# Altium PCB ZMBo.PcbDoc (part 2 of 3)
Units mil, origin at the board's own origin, x right, y up, seen from the top; angles counter-clockwise.
Board outline 6000 x 4000 mil, 4 copper layers (Top Layer, Groun Plane, Power Plane, Bottom Layer); 254 components, 259 nets, 1004 pads, 1790 vias.
Unrouted connection lines stored in the file: 212.
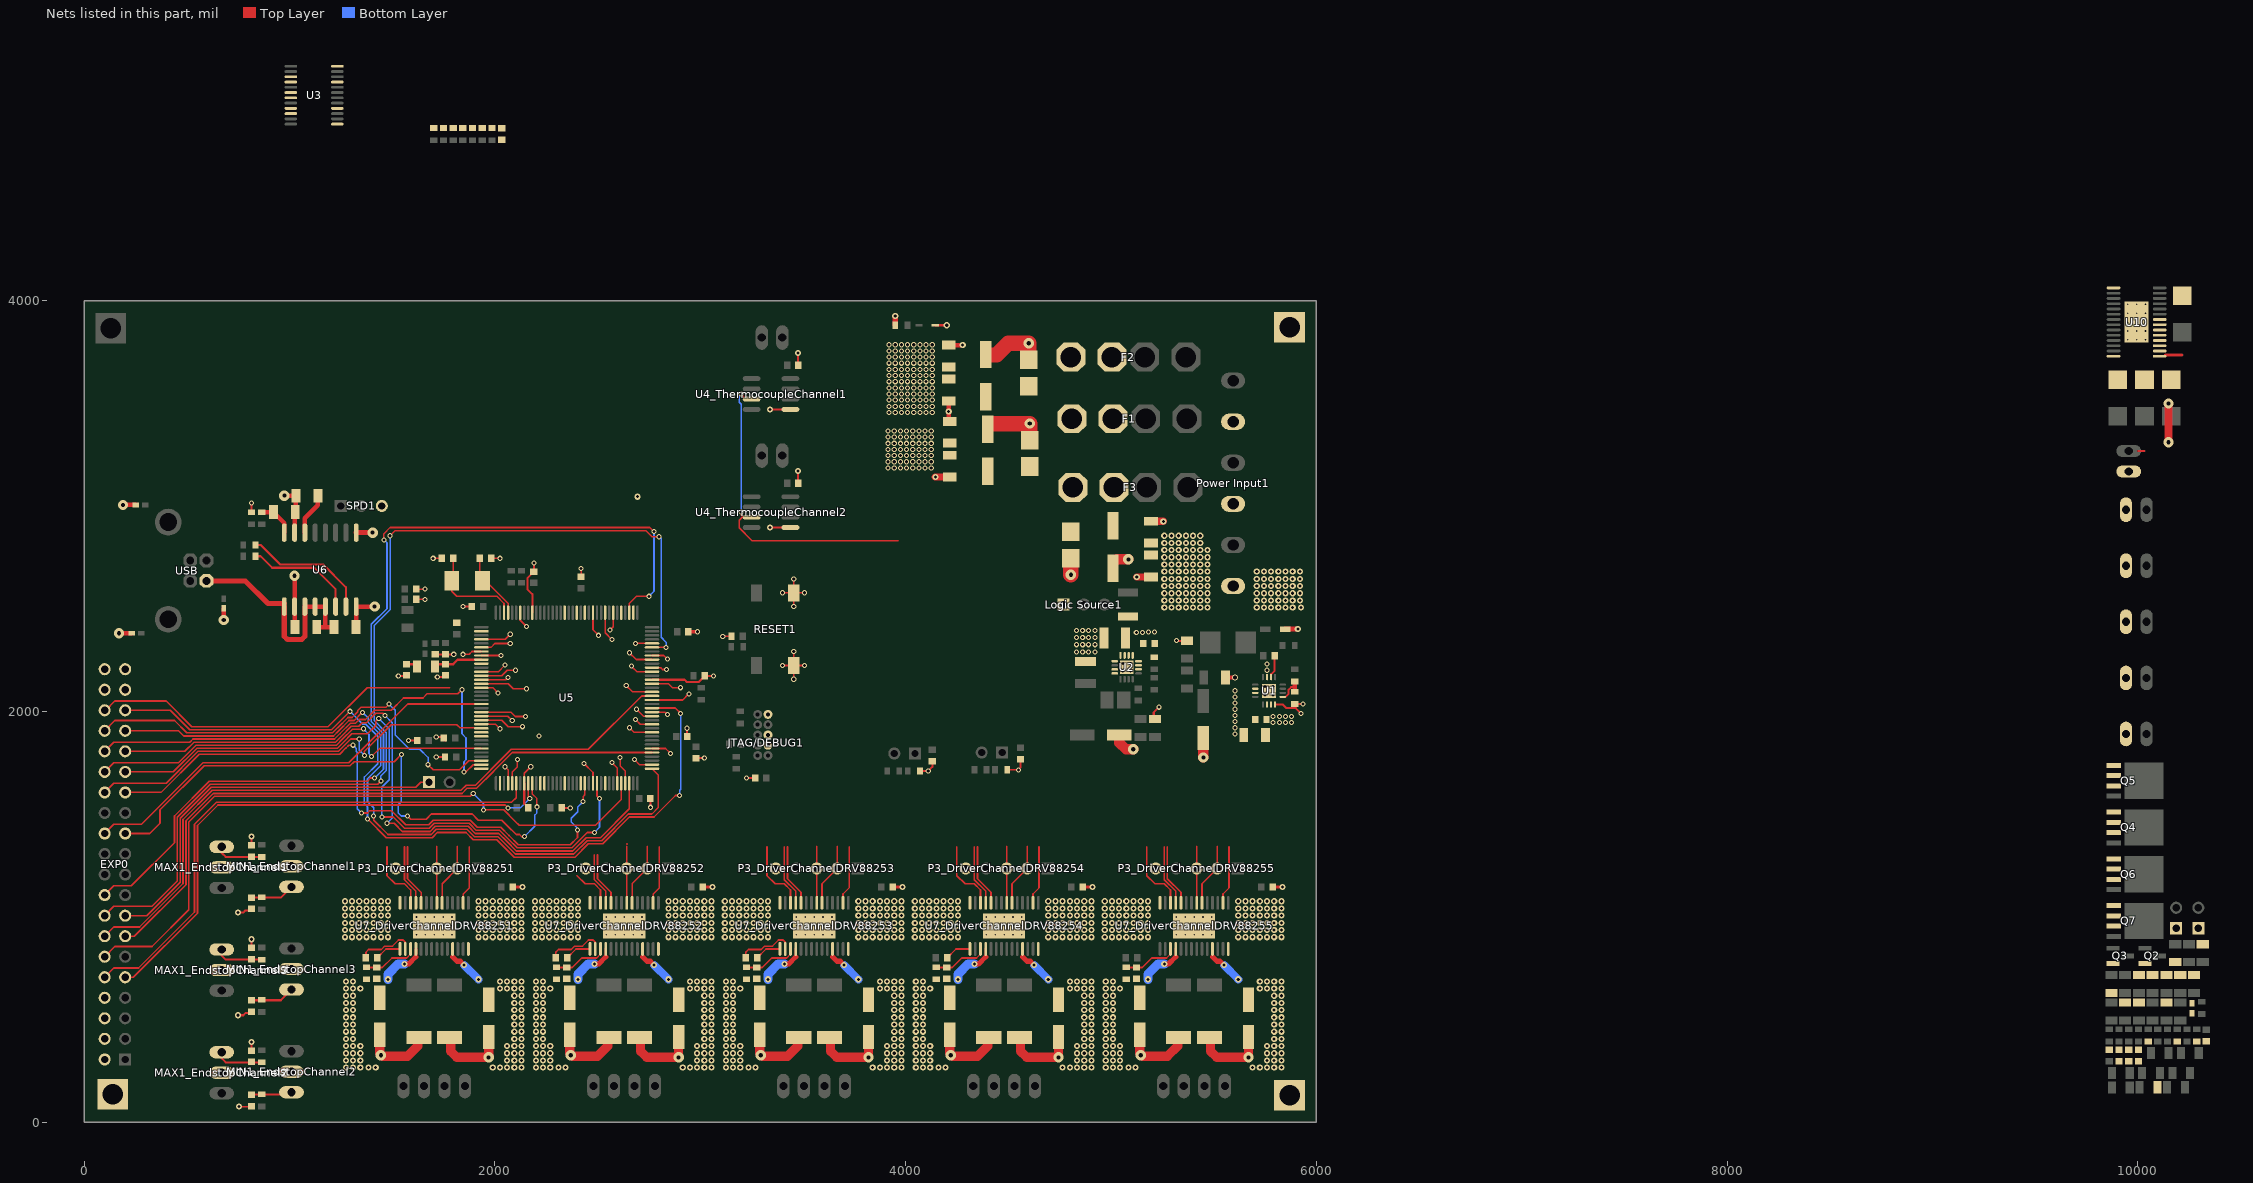
[diagram p4: the nets of this part, all layers, seen from the top]

## Via types
v1: diameter 30, hole 15, Top Layer to Bottom Layer, 1265 vias
v2: diameter 25, hole 15, Top Layer to Bottom Layer, 405 vias
v3: diameter 19.68, hole 7.87, Top Layer to Bottom Layer, 90 vias
v4: diameter 50, hole 20, Top Layer to Bottom Layer, 28 vias
v5: diameter 30, hole 20, Top Layer to Bottom Layer, 2 vias

## Nets (pads, with @x,y where several pads share a name; then routed paths per layer and width w, separated by ;. In a path a pad name is that pad's centre, name@x,y a point inside that pad or via, vN(x,y) a via of type N, cw(c..) or ccw(c..) an arc to the next point about the centre after c; other vN are vias at no path point) (continued)
+12VCC1: C10.2 C11.2 C16.1 C18.2 C19.2 C66_DriverChannelDRV88251.1 C66_DriverChannelDRV88252.1 C66_DriverChannelDRV88253.1 C66_DriverChannelDRV88254.1 C66_DriverChannelDRV88255.1 C69_DriverChannelDRV88251.1 C69_DriverChannelDRV88252.1 C69_DriverChannelDRV88253.1 C69_DriverChannelDRV88254.1 C69_DriverChannelDRV88255.1 C70_DriverChannelDRV88251.1 C70_DriverChannelDRV88252.1 C70_DriverChannelDRV88253.1 C70_DriverChannelDRV88254.1 C70_DriverChannelDRV88255.1 D8.2 F3.2 R30_DriverChannelDRV88251.1 R30_DriverChannelDRV88252.1 R30_DriverChannelDRV88253.1 R30_DriverChannelDRV88254.1 R30_DriverChannelDRV88255.1 R31.2 U1.2 U1.3 U1.11 U7_DriverChannelDRV88251.4 U7_DriverChannelDRV88251.11 U7_DriverChannelDRV88252.4 U7_DriverChannelDRV88252.11 U7_DriverChannelDRV88253.4 U7_DriverChannelDRV88253.11 U7_DriverChannelDRV88254.4 U7_DriverChannelDRV88254.11 U7_DriverChannelDRV88255.4 U7_DriverChannelDRV88255.11 | length 2214.5
  Top Layer w14: 1615.43,804.43 U7_DriverChannelDRV88251.4@1615.43,842.8 ; 1794.57,804.43 U7_DriverChannelDRV88251.11@1794.57,842.8 ; 2540.43,804.43 U7_DriverChannelDRV88252.4@2540.43,842.8 ; 2719.57,804.43 U7_DriverChannelDRV88252.11@2719.57,842.8 ; 3465.43,804.43 U7_DriverChannelDRV88253.4@3465.43,842.8 ; 3644.57,804.43 U7_DriverChannelDRV88253.11@3644.57,842.8 ; 4390.43,804.43 U7_DriverChannelDRV88254.4@4390.43,842.8 ; 4569.57,804.43 U7_DriverChannelDRV88254.11@4569.57,842.8 ; 5315.43,804.43 U7_DriverChannelDRV88255.4@5315.43,842.8 ; 5494.57,804.43 U7_DriverChannelDRV88255.11@5494.57,842.8
  Top Layer w25: v1(1560,770) 1581,770 1615.43,804.43 ; 1794.57,804.43 1816,783 1832,783 v1(1850,765) ; v1(2485,770) 2506,770 2540.43,804.43 ; 2719.57,804.43 2741,783 2757,783 v1(2775,765) ; v1(3410,770) 3431,770 3465.43,804.43 ; 3644.57,804.43 3666,783 3682,783 v1(3700,765) ; v1(4335,770) 4356,770 4390.43,804.43 ; 4569.57,804.43 4591,783 4607,783 v1(4625,765) ; v1(5260,770) 5281,770 5315.43,804.43 ; 5494.57,804.43 5516,783 5532,783 v1(5550,765)
  Bottom Layer w39: v1(1850,765) v1(1920,695) ; v1(2775,765) v1(2845,695) ; v1(3700,765) v1(3770,695) ; v1(4625,765) v1(4695,695) ; v1(5550,765) v1(5620,695)
  Bottom Layer w45: v1(1480,695) 1480,720 1530,770 v1(1560,770) ; v1(2405,695) 2405,720 2455,770 v1(2485,770) ; v1(3330,695) 3330,720 3380,770 v1(3410,770) ; v1(4255,695) 4255,720 4305,770 v1(4335,770) ; v1(5180,695) 5180,720 5230,770 v1(5260,770)
  other v1: 1275,265 1310,265 1345,265 1385,265 1420,265 1990,265 2025,265 2060,265 2095,265 2130,265 2200,265 2235,265 2270,265 2310,265 2345,265 2915,265 2915,265 2950,265 2950,265 2985,265 2985,265 3020,265 3020,265 3055,265 3055,265 3125,265 3160,265 3195,265 3235,265 3270,265 3840,265 3875,265 3910,265 3945,265 3980,265 4050,265 4085,265 4120,265 4160,265 4195,265 4765,265 4800,265 4835,265 4870,265 4905,265 4975,265 5010,265 5045,265 5085,265 5120,265 5690,265 5725,265 5760,265 5795,265 5830,265 1275,300 1310,300 1345,300 2060,300 2095,300 2130,300 2200,300 2235,300 2235,300 2270,300 2985,300 2985,300 3020,300 3020,300 3055,300 3055,300 3125,300 3160,300 3195,300 3910,300 3945,300 3980,300 4050,300 4085,300 4120,300 4835,300 4870,300 4905,300 4975,300 5010,300 5045,300 5760,300 5795,300 5830,300 1275,335 1310,335 1345,335 2060,335 2095,335 2130,335 2200,335 2235,335 2270,335 2985,335 3020,335 3055,335 3055,335 3125,335 3160,335 3195,335 3910,335 3945,335 3980,335 4050,335 4085,335 4120,335 4835,335 4870,335 4905,335 4975,335 5010,335 5045,335 5760,335 5795,335 5830,335 1275,370 1310,370 1345,370 2060,370 2095,370 2130,370 2200,370 2200,370 2235,370 2235,370 2270,370 2985,370 2985,370 3020,370 3020,370 3055,370 3055,370 3125,370 3160,370 3195,370 3910,370 3945,370 3980,370 4050,370 4085,370 4120,370 4835,370 4870,370 4905,370 4975,370 5010,370 5045,370 5760,370 5795,370 5830,370 1275,405 1310,405 2095,405 2130,405 2200,405 2200,405 2200,405 2200,405 2200,405 2235,405 2235,405 3020,405 3020,405 3055,405 3055,405 3125,405 3125,405 3160,405 3945,405 3980,405 4050,405 4050,405 4085,405 4870,405 4905,405 4975,405 4975,405 5010,405 5795,405 5830,405 1275,440 1310,440 2095,440 2130,440 2200,440 2200,440 2200,440 2200,440 2200,440 2235,440 2235,440 3020,440 3020,440 3055,440 3055,440 3125,440 3125,440 3160,440 3945,440 3980,440 4050,440 4050,440 4085,440 4870,440 4905,440 4975,440 4975,440 5010,440 5795,440 5830,440 1275,475 1310,475 2095,475 2130,475 2200,475 2200,475 2200,475 2200,475 2200,475 2235,475 2235,475 3020,475 3020,475 3055,475 3055,475 3125,475 3125,475 3160,475 3945,475 3980,475 4050,475 4050,475 4085,475 4870,475 4905,475 4975,475 4975,475 5010,475 5795,475 5830,475 1275,510 1310,510 2095,510 2130,510 2200,510 2200,510 2200,510 2200,510 2200,510 2235,510 2235,510 3020,510 3020,510 3055,510 3055,510 3125,510 3125,510 3160,510 3945,510 3980,510 4050,510 4050,510 4085,510 4870,510 4905,510 4975,510 4975,510 5010,510 5795,510 5830,510 1275,545 1310,545 2095,545 2130,545 2200,545 2200,545 2200,545 2200,545 2200,545 2235,545 2235,545 3020,545 3020,545 3055,545 3055,545 3125,545 3125,545 3160,545 3945,545 3980,545 4050,545 4050,545 4085,545 4870,545 4905,545 4975,545 4975,545 5010,545 5795,545 5830,545 1275,580 1310,580 2095,580 2130,580 2200,580 2200,580 2200,580 2200,580 2200,580 2235,580 2235,580 3020,580 3020,580 3055,580 3055,580 3125,580 3125,580 3160,580 3945,580 3980,580 4050,580 4050,580 4085,580 4870,580 4905,580 4975,580 4975,580 5010,580 5795,580 5830,580 1275,615 1310,615 2095,615 2130,615 2200,615 2200,615 2235,615 2235,615 3020,615 3020,615 3055,615 3055,615 3125,615 3160,615 3945,615 3980,615 4050,615 4085,615 4870,615 4905,615 4975,615 5010,615 5795,615 5830,615 1275,650 1310,650 1345,650 2025,650 2060,650 2095,650 2130,650 2200,650 2200,650 2235,650 2235,650 2270,650 2270,650 2950,650 2950,650 2985,650 2985,650 3020,650 3020,650 3055,650 3055,650 3125,650 3160,650 3195,650 3875,650 3910,650 3945,650 3980,650 4050,650 4085,650 4120,650 4800,650 4835,650 4870,650 4905,650 4975,650 5010,650 5045,650 5725,650 5760,650 5795,650 5830,650 1275,685 1310,685 2025,685 2060,685 2095,685 2130,685 2200,685 2200,685 2235,685 2235,685 2950,685 2950,685 2985,685 2985,685 3020,685 3020,685 3055,685 3055,685 3125,685 3160,685 3875,685 3910,685 3945,685 3980,685 4050,685 4085,685 4800,685 4835,685 4870,685 4905,685 4975,685 5010,685 5725,685 5760,685 5795,685 5830,685 5260,2505 5295,2505 5330,2505 5365,2505 5400,2505 5435,2505 5470,2505 5710,2505 5745,2505 5780,2505 5815,2505 5850,2505 5885,2505 5925,2505 5260,2540 5295,2540 5330,2540 5365,2540 5400,2540 5435,2540 5470,2540 5710,2540 5745,2540 5780,2540 5815,2540 5850,2540 5885,2540 5920,2540 5260,2575 5295,2575 5330,2575 5365,2575 5400,2575 5435,2575 5470,2575 5710,2575 5745,2575 5780,2575 5815,2575 5850,2575 5885,2575 5920,2575 5260,2610 5295,2610 5330,2610 5365,2610 5400,2610 5435,2610 5470,2610 5710,2610 5745,2610 5780,2610 5815,2610 5850,2610 5885,2610 5920,2610 5260,2645 5295,2645 5330,2645 5365,2645 5400,2645 5435,2645 5470,2645 5710,2645 5745,2645 5780,2645 5815,2645 5850,2645 5885,2645 5920,2645 5260,2680 5295,2680 5330,2680 5365,2680 5400,2680 5435,2680 5470,2680 5710,2680 5745,2680 5780,2680 5815,2680 5850,2680 5885,2680 5920,2680 5260,2715 5295,2715 5330,2715 5365,2715 5400,2715 5435,2715 5470,2715 5260,2750 5295,2750 5330,2750 5365,2750 5400,2750 5435,2750 5470,2750 5260,2785 5295,2785 5330,2785 5365,2785 5400,2785 5435,2785 5470,2785 5260,2820 5295,2820 5330,2820 5365,2820 5400,2820 5435,2820 5260,2855 5295,2855 5330,2855 5365,2855 5400,2855 5435,2855
  other v2: 5790,1945 5820,1945 5850,1945 5880,1945 5790,1975 5820,1975 5850,1975 5880,1975 5760.16,2200 5760,2230
+12VCC2: C3.1 C5.2 C6.2 D4.2 D12.2 D15.2 D17.2 D19.2 F2.2 FAN-0.1 FAN-1.1 FAN-2.1 HEAT-0.1 HEAT-1.1 HEATBED.1 R1.2 R13.1 R47.1 R56.2 R60.2 R64.2 R68.2 U10.1 | length 45.2
  Top Layer w8: R1.2@3950,3880.47 R1.2@3950.47,3880
  Top Layer w25: R1.2@3950,3880.47 v1(3950,3925)
  other v2: 3920,3455 3950,3455 3980,3455 4010,3455 4040,3455 4070,3455 4100,3455 4130,3455 3920,3485 3950,3485 3980,3485 4010,3485 4040,3485 4070,3485 4100,3485 4130,3485 3920,3515 3950,3515 3980,3515 4010,3515 4040,3515 4070,3515 4100,3515 4130,3515 3920,3545 3950,3545 3980,3545 4010,3545 4040,3545 4070,3545 4100,3545 4130,3545 3920,3575 3950,3575 3980,3575 4010,3575 4040,3575 4070,3575 4100,3575 4130,3575 3920,3605 3950,3605 3980,3605 4010,3605 4040,3605 4070,3605 4100,3605 4130,3605 3920,3635 3950,3635 3980,3635 4010,3635 4040,3635 4070,3635 4100,3635 4130,3635 3920,3665 3950,3665 3980,3665 4010,3665 4040,3665 4070,3665 4100,3665 4130,3665 3920,3695 3950,3695 3980,3695 4010,3695 4040,3695 4070,3695 4100,3695 4130,3695 3920,3725 3950,3725 3980,3725 4010,3725 4040,3725 4070,3725 4100,3725 4130,3725 3920,3755 3950,3755 3980,3755 4010,3755 4040,3755 4070,3755 4100,3755 4130,3755 3920,3785 3950,3785 3980,3785 4010,3785 4040,3785 4070,3785 4100,3785 4130,3785
+12VCC3: C12.1 C14.2 C15.2 D6.2 F1.2
  other v2: 3915,3185 3945,3185 3975,3185 4005,3185 4035,3185 4065,3185 4095,3185 4125,3185 3915,3215 3945,3215 3975,3215 4005,3215 4035,3215 4065,3215 4095,3215 4125,3215 3915,3245 3945,3245 3975,3245 4005,3245 4035,3245 4065,3245 4095,3245 4125,3245 3915,3275 3945,3275 3975,3275 4005,3275 4035,3275 4065,3275 4095,3275 4125,3275 3915,3305 3945,3305 3975,3305 4005,3305 4035,3305 4065,3305 4095,3305 4125,3305 3915,3335 3945,3335 3975,3335 4005,3335 4035,3335 4065,3335 4095,3335 4125,3335 3915,3365 3945,3365 3975,3365 4005,3365 4035,3365 4065,3365 4095,3365 4125,3365
ADC_TRIGGER: U5.36
ATSAM_SS: U5.64
AVDD3.3: C64.2 FB9.1 | length 56.9
  Top Layer w12: C64.2@1570,2230.12 1609.13,2230.12 FB9.1@1621.69,2217.56
AVREF: C65.2 FB9.2 U5.9 | length 240.6
  Top Layer w12: FB9.2@1708.31,2217.56 1720.87,2230.12 C65.2@1760,2230.12 1797.56,2230.12 1819.45,2252.01 U5.9@1934.65,2252.01
BED_PWM: R44.2 U10.17
BST: C7.2 U1.10 | length 110.4
  Top Layer w10: U1.10@5779.84,2166.93 5779.84,2180.59 5797.56,2198.3 C7.2@5797.56,2270
DIR: P3_DriverChannelDRV88251.2 P3_DriverChannelDRV88252.2 P3_DriverChannelDRV88253.2 P3_DriverChannelDRV88254.2 P3_DriverChannelDRV88255.2 U7_DriverChannelDRV88251.20 U7_DriverChannelDRV88252.20 U7_DriverChannelDRV88253.20 U7_DriverChannelDRV88254.20 U7_DriverChannelDRV88255.20 | length 1530
  Top Layer w8: U7_DriverChannelDRV88251.20@1743.39,1067.2 1743.39,1160.89 P3_DriverChannelDRV88251.2@1817.5,1235 1817.5,1342.5 ; U7_DriverChannelDRV88252.20@2668.39,1067.2 2668.39,1160.89 P3_DriverChannelDRV88252.2@2742.5,1235 2742.5,1342.5 ; U7_DriverChannelDRV88253.20@3593.39,1067.2 3593.39,1160.89 P3_DriverChannelDRV88253.2@3667.5,1235 3667.5,1342.5 ; U7_DriverChannelDRV88254.20@4518.39,1067.2 4518.39,1160.89 P3_DriverChannelDRV88254.2@4592.5,1235 4592.5,1342.5 ; U7_DriverChannelDRV88255.20@5443.39,1067.2 5443.39,1160.89 P3_DriverChannelDRV88255.2@5517.5,1235 5517.5,1342.5
DIR1: U5.113
DIR2: U5.110
DIR3: U5.101 | length 81.6
  Top Layer w8: U5.101@2765.35,2271.69 2823.31,2271.69 v2(2840,2255)
DIR4: U5.98 | length 74.5
  Top Layer w8: U5.98@2765.35,2212.64 2807.36,2212.64 2816.18,2203.82 v2(2836.18,2203.82)
DIR5: U5.92 | length 138
  Top Layer w8: v2(2640,2125) 2670.47,2094.53 U5.92@2765.35,2094.53
DIR_EXP1: EXP0.27 U5.59 | length 3014.4
  Top Layer w8: EXP0.27@200,1605 374.4,1605 560.4,1791 1244.38,1791 1274.88,1821.5 1275.09,1821.5 1288.59,1835 v2(1310,1835) ; v2(1350,1505) 1380,1505 1390,1515 1498.38,1515 1566.38,1447 1677.6,1447 1700.6,1470 1879.8,1470 1914.8,1435 2029.07,1435 2069.13,1394.94 2069.46,1394.94 2114.4,1350 2366.82,1350 2402.5,1385.68 v2(2402.5,1422.5) ; v2(2430,1560) 2430,1585 2438.58,1593.58 U5.59@2438.58,1649.65
  Bottom Layer w8: v2(1310,1835) 1326,1819 1326,1804.2 1330,1800.2 1330,1525 v2(1350,1505) ; v2(2402.5,1422.5) 2402.5,1430.68 2372.5,1460.68 2372.5,1479.32 2403.94,1510.76 2403.94,1533.94 v2(2430,1560)
DIR_EXP2: EXP0.28 U5.26 | length 2088.9
  Top Layer w8: EXP0.28@100,1605 145,1650 399.6,1650 554.6,1805 1238.58,1805 1269.08,1835.5 1269.29,1835.5 1298.79,1865 v2(1340,1865) ; v2(1365,1785) 1365,1805 1495,1935 1815,1935 1830,1920 1932.01,1920 U5.26@1934.65,1917.36
  Bottom Layer w8: v2(1340,1865) 1340,1810 v2(1365,1785)
DM_N: R18.1 U6.6 | length 541.9
  Top Layer w10: R18.1@834.53,2755 860,2755 916,2699 1121,2699 1225,2595 U6.6@1225,2509.88
DP_P: R20.1 U6.7 | length 620.5
  Top Layer w10: R20.1@834.53,2810 860,2810 955,2715 1165,2715 1275,2605 U6.7@1275,2509.88
DRV_RESET: U7_DriverChannelDRV88251.16 U7_DriverChannelDRV88252.16 U7_DriverChannelDRV88253.16 U7_DriverChannelDRV88254.16 U7_DriverChannelDRV88255.16 | length 1424.6
  Top Layer w8: U7_DriverChannelDRV88251.16@1845.75,1067.2 1845.75,1110.75 1875,1140 1875,1340 ; U7_DriverChannelDRV88252.16@2770.75,1067.2 2770.75,1110.75 2800,1140 2800,1340 ; U7_DriverChannelDRV88253.16@3695.75,1067.2 3695.75,1110.75 3725,1140 3725,1340 ; U7_DriverChannelDRV88254.16@4620.75,1067.2 4620.75,1110.75 4650,1140 4650,1340 ; U7_DriverChannelDRV88255.16@5545.75,1067.2 5545.75,1110.75 5575,1140 5575,1340
DRV_RESET1: U5.82 | length 119.6
  Top Layer w8: v2(2655,1920) 2677.32,1897.68 U5.82@2765.35,1897.68
DRV_RESET2: U5.86 | length 89.3
  Top Layer w8: v2(2690,2010) 2723.58,1976.42 U5.86@2765.35,1976.42
DRV_RESET3: U5.90 | length 192
  Top Layer w8: U5.90@2765.35,2055.16 2915.16,2055.16 v2(2945,2085)
DRV_RESET4: U5.94 | length 147.5
  Top Layer w8: U5.94@2765.35,2133.9 2846.1,2133.9 2865,2115 v2(2905,2115)
DRV_RESET5: U5.97 | length 111.6
  Top Layer w8: v2(2665,2220) 2692.05,2192.95 U5.97@2765.35,2192.95
DRV_RESET_EXP1: EXP0.35 U5.88 | length 4087
  Top Layer w8: EXP0.35@200,2005 420,2005 515,1910 1204.99,1910 1228.49,1933.5 v2(1295,2000) ; v2(1380,1476.25) 1471.25,1385 1695,1385 1720,1410 1860,1410 1895,1375 2009.87,1375 2094.87,1290 2390,1290 2455,1355 2525,1355 2655,1485 2775,1485 2880,1590 v2(2900,1590) ; U5.88@2765.35,2015.79 2879.21,2015.79 v2(2905,1990)
  Bottom Layer w8: v2(1295,2000) 1357.5,1937.5 1371.28,1937.5 1430,1878.78 1430,1745 1365,1680 1365,1550 1380,1535 v2(1380,1476.25) ; v2(2900,1590) 2900,1615 2905,1620 v2(2905,1990)
DRV_RESET_EXP2: EXP0.36 U5.2 | length 1829.1
  Top Layer w8: EXP0.36@100,2005 105,2005 150,2050 400,2050 525,1925 1188.18,1925 1378.18,2115 1780,2115
EN: P3_DriverChannelDRV88251.3 P3_DriverChannelDRV88252.3 P3_DriverChannelDRV88253.3 P3_DriverChannelDRV88254.3 P3_DriverChannelDRV88255.3 U7_DriverChannelDRV88251.21 U7_DriverChannelDRV88252.21 U7_DriverChannelDRV88253.21 U7_DriverChannelDRV88254.21 U7_DriverChannelDRV88255.21 | length 1379.6
  Top Layer w8: P3_DriverChannelDRV88251.3@1717.5,1235 1717.5,1342.5 ; U7_DriverChannelDRV88251.21@1717.8,1067.2 P3_DriverChannelDRV88251.3@1717.8,1235 ; P3_DriverChannelDRV88252.3@2642.5,1235 2642.5,1342.5 ; U7_DriverChannelDRV88252.21@2642.8,1067.2 P3_DriverChannelDRV88252.3@2642.8,1235 ; 2642.8,1352.8 2645,1355 ; P3_DriverChannelDRV88253.3@3567.5,1235 3567.5,1342.5 ; U7_DriverChannelDRV88253.21@3567.8,1067.2 P3_DriverChannelDRV88253.3@3567.8,1235 ; P3_DriverChannelDRV88254.3@4492.5,1235 4492.5,1342.5 ; U7_DriverChannelDRV88254.21@4492.8,1067.2 P3_DriverChannelDRV88254.3@4492.8,1235 ; P3_DriverChannelDRV88255.3@5417.5,1235 5417.5,1342.5 ; U7_DriverChannelDRV88255.21@5417.8,1067.2 P3_DriverChannelDRV88255.3@5417.8,1235
EN1: U5.12 | length 128.6
  Top Layer w8: U5.12@1934.65,2192.95 2017.95,2192.95 v2(2050,2225)
EN2: U5.13 | length 176.4
  Top Layer w8: U5.13@1934.65,2173.27 2033.27,2173.27 2060,2200 v2(2100,2200)
EN3: U5.14 | length 135.1
  Top Layer w8: U5.14@1934.65,2153.58 2053.58,2153.58 v2(2065,2165)
EN4: U5.15 | length 230.3
  Top Layer w8: U5.15@1934.65,2133.9 2066.1,2133.9 2090,2110 v2(2155,2110)
EN5: U5.16 | length 90.4
  Top Layer w8: U5.16@1934.65,2114.21 1990.79,2114.21 v2(2015,2090)
EN_EXP1: EXP0.23 U5.46 | length 2810.9
  Top Layer w8: EXP0.23@200,1405 320,1405 370,1455 370,1520 585,1735 1295,1735 1315,1755 1510,1755 v2(1545,1790) ; v2(1575,1490) 1590,1475 1666.01,1475 1691.01,1500 1889.4,1500 1919.9,1469.5 2034.17,1469.5 2080.72,1422.94 2081.05,1422.94 2103.99,1400 2120,1400 2130,1390 v2(2145,1390) ; U5.46@2182.68,1649.65 2182.68,1597.32 2205,1575 v2(2205,1535)
  Bottom Layer w8: v2(1545,1790) 1545,1560 1530,1545 1530,1505 1545,1490 v2(1575,1490) ; v2(2145,1390) 2195,1440 2195,1495 2205,1505 v2(2205,1535)
EN_EXP2: EXP0.24 U5.20 | length 2095.8
  Top Layer w8: EXP0.24@100,1405 145,1450 280,1450 579,1749 1289,1749 1575.47,2035.47 U5.20@1934.65,2035.47
ERASE: U5.87 | length 79.2
  Top Layer w8: U5.87@2765.35,1996.1 2828.9,1996.1 v2(2840,1985)
EXP_CS: EXP0.9 U5.45 | length 2669.6
  Top Layer w8: EXP0.9@200,705 240,705 552,1017 552,1444.01 651.99,1544 2051,1544 v2(2065,1530) ; U5.45@2162.99,1649.65 2162.99,1582.01 v2(2170,1575)
  Bottom Layer w8: v2(2065,1530) 2125,1530 v2(2170,1575)
EXP_INTERRUP1: EXP0.16 U5.103 | length 5015.9
  Top Layer w8: EXP0.16@100,1005 145,1050 330.6,1050 454,1173.4 454,1484.6 614.4,1645 1430,1645 v2(1445,1660) ; v2(1490,2855) 1515,2880 2735,2880 2765,2850 v2(2800,2850) ; U5.103@2765.35,2311.06 v2(2833.94,2311.06)
  Bottom Layer w8: v2(1445,1660) 1445,1685.2 1472,1712.2 1472,1896.18 1412.5,1955.68 1412.5,2417.7 1490,2495.2 v2(1490,2855) ; v2(2800,2850) 2810,2840 2810,2360 2833.94,2336.06 v2(2833.94,2311.06)
EXP_INTERRUP2: EXP0.18 U5.111 | length 4713
  Top Layer w8: EXP0.18@100,1105 145,1150 230,1150 440,1360 440,1490.4 609.6,1660 1380,1660 1395,1675 v2(1415,1675) ; v2(1460,2835) 1460,2865 1490,2895 2755,2895 v2(2775,2875) ; U5.111@2655.12,2480.35 2655.12,2525.12 2690,2560 v2(2750,2560)
  Bottom Layer w8: v2(1415,1675) 1458,1718 1458,1890.38 1398.5,1949.88 1398.5,2423.5 1475,2500 1475,2820 v2(1460,2835) ; v2(2750,2560) 2775,2585 v2(2775,2875)
EXP_SYNC: U5.100 | length 124
  Top Layer w8: v2(2655,2285) 2687.99,2252.01 U5.100@2765.35,2252.01
FB: R7.1 R10.2 U1.5 | length 134.9
  Top Layer w10: U1.5@5836.93,2070.47 5850.59,2070.47 5865,2084.89 5865,2105 5877.74,2117.74 5895,2117.74
  Top Layer w20: R10.2@5895,2095 R7.1@5895,2140.47
FET_CS: R54.1 U5.49
FET_PWM1: R39.2 U10.22
FET_PWM2: R40.2 U10.21
FET_PWM3: R41.2 U10.20
FET_PWM4: R42.2 U10.19
FET_PWM5: R43.2 U10.18
FET_RESET: "FET MCU RESET.1" U5.38
GND: "Power Input1.2" "Power Input1.4" "Power Input1.6" C1_EndstopChannel1.2 C1_EndstopChannel2.2 C1_EndstopChannel3.2 C2_EndstopChannel1.2 C2_EndstopChannel2.2 C2_EndstopChannel3.2 C3.2 C4.2 C5.1 C6.1 C8.1 C9.2 C10.1 C11.1 C12.2 C13.1 C14.1 C15.1 C16.2 C17.2 C18.1 C19.1 C20.1 C21.1 C22.2 C23.2 C24.1 C25.1 C26.2 C31_ThermocoupleChannel1.1 C31_ThermocoupleChannel2.1 C32.1 C33.1 C36.1 C37.1 C38.1 C39.1 C40.1 C41.1 C42.1 C43.1 C44.1 C45.1 C46.1 C47.1 C48.1 C49.1 C50.1 C51.1 C54.1 C55.1 C56.1 C57.1 C60.1 C61.1 C62.1 C63.1 C64.1 C65.1 C69_DriverChannelDRV88251.2 C69_DriverChannelDRV88252.2 C69_DriverChannelDRV88253.2 C69_DriverChannelDRV88254.2 C69_DriverChannelDRV88255.2 C70_DriverChannelDRV88251.2 C70_DriverChannelDRV88252.2 C70_DriverChannelDRV88253.2 C70_DriverChannelDRV88254.2 C70_DriverChannelDRV88255.2 C71_DriverChannelDRV88251.1 C71_DriverChannelDRV88252.1 C71_DriverChannelDRV88253.1 C71_DriverChannelDRV88254.1 C71_DriverChannelDRV88255.1 D1.1 D4.1 D5.1 D6.1 D7.1 D8.1 D9.1 EXP0.2 EXP0.4 EXP0.6 EXP0.8 JTAG/DEBUG1.3 JTAG/DEBUG1.5 JTAG/DEBUG1.9 MAX1_EndstopChannel1.2 MAX1_EndstopChannel2.2 MAX1_EndstopChannel3.2 MIN1_EndstopChannel1.2 MIN1_EndstopChannel2.2 MIN1_EndstopChannel3.2 P3_DriverChannelDRV88251.5 P3_DriverChannelDRV88252.5 P3_DriverChannelDRV88253.5 P3_DriverChannelDRV88254.5 P3_DriverChannelDRV88255.5 pad.@140,135 pad.@5870,130 pad.@5870,3870 Q2.2 Q3.2 Q4.1 Q4.2 Q4.3 Q5.1 Q5.2 Q5.3 Q6.1 Q6.2 Q6.3 Q7.1 Q7.2 Q7.3 R10.1 R15.2 R28.1 R29.2 R32_DriverChannelDRV88251.1 R32_DriverChannelDRV88252.1 R32_DriverChannelDRV88253.1 R32_DriverChannelDRV88254.1 R32_DriverChannelDRV88255.1 R33_DriverChannelDRV88251.1 R33_DriverChannelDRV88252.1 R33_DriverChannelDRV88253.1 R33_DriverChannelDRV88254.1 R33_DriverChannelDRV88255.1 R38.1 R46.2 R55.2 R59.2 R63.2 R67.2 R71.2 RESET1.2 SPD1.3 U1.4 U1.14 U1.15 U1.17 U2.6 U2.7 U2.8 U2.15 U2.16 U2.17 U3.3 U3.4 U3.9 U3.10 U3.13 U3.16 U3.21 U3.24 U4_ThermocoupleChannel1.1 U4_ThermocoupleChannel2.1 U5.8 U5.44 U5.61 U5.95 U5.104 U5.115 U5.135 U5.138 U6.9 U6.15 U7_DriverChannelDRV88251.14 U7_DriverChannelDRV88251.28 U7_DriverChannelDRV88251.29 U7_DriverChannelDRV88252.14 U7_DriverChannelDRV88252.28 U7_DriverChannelDRV88252.29 U7_DriverChannelDRV88253.14 U7_DriverChannelDRV88253.28 U7_DriverChannelDRV88253.29 U7_DriverChannelDRV88254.14 U7_DriverChannelDRV88254.28 U7_DriverChannelDRV88254.29 U7_DriverChannelDRV88255.14 U7_DriverChannelDRV88255.28 U7_DriverChannelDRV88255.29 U10.16 U10.29 | length 9555.5
  Top Layer w8: v1(755,75) 812.09,75 C1_EndstopChannel2.2@815,77.91 ; R15.2@815,2969.53 v2(815,3015) ; v4@1404.88,2870.12 v4(1405,2870) ; C32.1@1617.56,2545 v2(1660,2545) ; C33.1@1617.56,2595 v2(1660,2595) ; v2(1700,2745) C44.1@1742.44,2745 ; v2(1845,2510) C51.1@1887.44,2510 ; C43.1@1982.56,2745 v2(2025,2745) ; U5.44@2143.31,1649.65 2143.31,1698.31 v2(2175,1730) ; C42.1@2420,2655.12 v2(2420,2695) ; v2(2435,1745) 2477.95,1702.05 U5.61@2477.95,1649.65 ; v2(2560,2395) 2576.38,2411.38 U5.115@2576.38,2480.35 ; v2@2685,2330 v2(2685.75,2330.75) U5.104@2765.35,2330.75 ; v2(3110,2365) C63.1@3152.44,2365 ; v2(3225,1675) C62.1@3267.44,1675 ; v2(3400,2222.83) RESET1.2@3455.55,2222.83 ; v2(3400,2577.17) RESET1.2@3455.55,2577.17 ; v2(3455.55,2156.22) RESET1.2@3455.55,2222.83 ; v2(3455.55,2290.67) RESET1.2@3455.55,2222.83 ; v2(3455.55,2510.55) RESET1.2@3455.55,2577.17 ; v2(3455.55,2645) RESET1.2@3455.55,2577.17 ; v2(3507.83,2222.83) RESET1.2@3455.55,2222.83 ; v2(3507.83,2577.17) RESET1.2@3455.55,2577.17 ; R29.2@4494.53,1715 v2(4550,1715) 4560,1725 C60.1@4560,1767.44
  Top Layer w10: v1(750,520) 775,520 785,530 815,530 C1_EndstopChannel3.2@815,537.91 ; v1(750,1020) 775,1020 785,1030 815,1030 C1_EndstopChannel1.2@815,1037.91 ; C2_EndstopChannel2.2@815,347.56 v1(815,390) ; C2_EndstopChannel3.2@815,847.56 v1(815,890) ; C2_EndstopChannel1.2@815,1347.56 v1(815,1390) ; C57.1@1025,2966.85 C57.1@1028.15,2970 C57.1@1031.85,2973.7 ; v2(1530,2172.56) 1567.56,2172.56 C64.1@1570,2175 ; v2(1580,1857.56) C45.1@1622.44,1857.56 ; C54.1@1710,2277.44 1710.12,2277.56 v2(1800,2277.56) ; v2(1715,1777.56) C39.1@1757.44,1777.56 ; v2(1715,1875) C40.1@1752.44,1875 ; v2(1720,2167.56) 1752.56,2167.56 C65.1@1760,2175 ; U5.8@1934.65,2271.69 2029.13,2271.69 v2(2030,2272.56) ; U5.138@2123.62,2480.35 2123.62,2443.94 v2(2155,2412.56) ; U5.44@2143.31,1649.65 2143.31,1549.25 C46.1@2162.56,1530 ; U5.135@2182.68,2480.35 2182.68,2569.88 2160,2592.56 2160,2650.12 C50.1@2190,2680.12 v2(2190,2722.56) ; C41.1@2325,1530 v2(2367.44,1530) ; v2(2757.56,1532.56) C47.1@2757.56,1575 ; U5.95@2765.35,2153.58 2923.98,2153.58 2935,2142.56 2992.56,2142.56 C49.1@3022.56,2172.56 v2(3065,2172.56) ; v2(2935,1917.56) 2935,1880.12 C38.1@2937.56,1877.56 ; C48.1@2980,1772.44 v2(3020,1772.44) ; v1(3340,2895) U4_ThermocoupleChannel2.1@3439.49,2895 ; v1(3340,3470) U4_ThermocoupleChannel1.1@3439.49,3470 ; C31_ThermocoupleChannel2.1@3475.51,3112.56 v1(3475.51,3170) ; C31_ThermocoupleChannel1.1@3475.51,3687.56 v1(3475.51,3745) ; R28.1@4070,1709.53 v2(4110.47,1709.53) 4130.47,1729.53 C61.1@4130.47,1756.97 ; D9.1@5215.08,1961.69 5208.58,1968.19 5208.58,1995.04 v2(5233.58,2020.04) ; v2(5320,2345) 5321.61,2343.39 D7.1@5370,2343.39 ; U1.4@5799.53,2033.07 5836.93,2033.07 5855,2015 5900,2015 v2(5925,1990) ; R10.1@5895.47,2035 v2(5935,2035) ; 10001.06,3267 10031.53,3267
  Top Layer w12: D1.1@4144.37,3880 v1(4200.47,3880)
  Top Layer w15: C71_DriverChannelDRV88251.1@2087.56,1145 v1(2135.12,1145) ; C37.1@2942.56,2387.56 v2(2987.44,2387.56) ; C71_DriverChannelDRV88252.1@3012.56,1145 v1(3060.12,1145) ; C71_DriverChannelDRV88253.1@3937.56,1145 v1(3985.12,1145) ; C71_DriverChannelDRV88254.1@4862.56,1145 v1(4910.12,1145) ; C71_DriverChannelDRV88255.1@5787.56,1145 v1(5835.12,1145)
  Top Layer w20: C8.1@5558.15,2165 v5(5605,2165)
  Top Layer w22: v4(975,3050) C56.1@1031.85,3050 C57.1@1031.85,2973.7 ; U6.15@1025,2870.12 C57.1@1025,2966.85 ; C14.1@4210,3416.81 C6.1@4210,3511.85 ; C5.1@4210,3783.15 v1(4278.15,3783.15)
  Top Layer w25: U6.9@1325,2870.12 v4@1404.88,2870.12 ; D5.1@5848.23,2400 v1(5910,2400)
  Top Layer w35: v1(4145,3140.51) C15.1@4215,3140.51 ; v1(5125.79,2654.21) C18.1@5195,2654.21 ; C19.1@5195,2925.51 v1@5254.49,2925.51
  Top Layer w40: v4@10150.08,3310.08 10150.08,3393.86 v4(10150.08,3499.24)
  Top Layer w45: C69_DriverChannelDRV88251.2@1440,414.45 1440,335 1455,320 1575,320 1625,370 R33_DriverChannelDRV88251.1@1625,412.05 ; R32_DriverChannelDRV88251.1@1785,412.05 1785,345 1815,315 v4(1970,315) C70_DriverChannelDRV88251.2@1970,414.45 ; C69_DriverChannelDRV88252.2@2365,414.45 2365,335 2380,320 2500,320 2550,370 R33_DriverChannelDRV88252.1@2550,412.05 ; R32_DriverChannelDRV88252.1@2710,412.05 2710,345 2740,315 v4(2895,315) C70_DriverChannelDRV88252.2@2895,414.45 ; C69_DriverChannelDRV88253.2@3290,414.45 3290,335 3305,320 3425,320 3475,370 R33_DriverChannelDRV88253.1@3475,412.05 ; R32_DriverChannelDRV88253.1@3635,412.05 3635,345 3665,315 v4(3820,315) C70_DriverChannelDRV88253.2@3820,414.45 ; C69_DriverChannelDRV88254.2@4215,414.45 4215,335 4230,320 4350,320 4400,370 R33_DriverChannelDRV88254.1@4400,412.05 ; R32_DriverChannelDRV88254.1@4560,412.05 4560,345 4590,315 v4(4745,315) C70_DriverChannelDRV88254.2@4745,414.45 ; C69_DriverChannelDRV88255.2@5140,414.45 5140,335 5155,320 5275,320 5325,370 R33_DriverChannelDRV88255.1@5325,412.05 ; R32_DriverChannelDRV88255.1@5485,412.05 5485,345 5515,315 v4(5670,315) C70_DriverChannelDRV88255.2@5670,414.45
  Top Layer w50: C16.2@5010,2697.64 5010,2720 5030,2740 v4(5085,2740) ; C23.2@5041.13,1884.31 5041.13,1847.49 5073.58,1815.04 v4(5108.58,1815.04) ; v4(5450,1775) C9.2@5450,1869.45
  Top Layer w75: C3.2@4405,3735 4443.5,3735 4500.86,3792.36 v4(4600,3792.36) D4.1@4600,3711.34 ; 4427.64,3401.02 v4(4605,3401.02) D6.1@4605,3320 ; v4(4805,2665) D8.1@4805,2746.02
  other v1: 1270,900 1305,900 1340,900 1375,900 1410,900 1445,900 1480,900 1920,900 1955,900 1990,900 2025,900 2060,900 2095,900 2130,900 2195,900 2230,900 2265,900 2300,900 2335,900 2370,900 2405,900 2845,900 2880,900 2915,900 2950,900 2985,900 3020,900 3055,900 3120,900 3155,900 3190,900 3225,900 3260,900 3295,900 3330,900 3770,900 3805,900 3840,900 3875,900 3910,900 3945,900 3980,900 4045,900 4080,900 4115,900 4150,900 4185,900 4220,900 4255,900 4695,900 4730,900 4765,900 4800,900 4835,900 4870,900 4905,900 4970,900 5005,900 5040,900 5075,900 5110,900 5145,900 5180,900 5620,900 5655,900 5690,900 5725,900 5760,900 5795,900 5830,900 1270,935 1305,935 1340,935 1375,935 1410,935 1445,935 1480,935 1920,935 1955,935 1990,935 2025,935 2060,935 2095,935 2130,935 2195,935 2230,935 2265,935 2300,935 2335,935 2370,935 2405,935 2845,935 2880,935 2915,935 2950,935 2985,935 3020,935 3055,935 3120,935 3155,935 3190,935 3225,935 3260,935 3295,935 3330,935 3770,935 3805,935 3840,935 3875,935 3910,935 3945,935 3980,935 4045,935 4080,935 4115,935 4150,935 4185,935 4220,935 4255,935 4695,935 4730,935 4765,935 4800,935 4835,935 4870,935 4905,935 4970,935 5005,935 5040,935 5075,935 5110,935 5145,935 5180,935 5620,935 5655,935 5690,935 5725,935 5760,935 5795,935 5830,935 1270,970 1305,970 1340,970 1375,970 1410,970 1445,970 1480,970 1920,970 1955,970 1990,970 2025,970 2060,970 2095,970 2130,970 2195,970 2230,970 2265,970 2300,970 2335,970 2370,970 2405,970 2845,970 2880,970 2915,970 2950,970 2985,970 3020,970 3055,970 3120,970 3155,970 3190,970 3225,970 3260,970 3295,970 3330,970 3770,970 3805,970 3840,970 3875,970 3910,970 3945,970 3980,970 4045,970 4080,970 4115,970 4150,970 4185,970 4220,970 4255,970 4695,970 4730,970 4765,970 4800,970 4835,970 4870,970 4905,970 4970,970 5005,970 5040,970 5075,970 5110,970 5145,970 5180,970 5620,970 5655,970 5690,970 5725,970 5760,970 5795,970 5830,970 1270,1005 1305,1005 1340,1005 1375,1005 1410,1005 1445,1005 1480,1005 1920,1005 1955,1005 1990,1005 2025,1005 2060,1005 2095,1005 2130,1005 2195,1005 2230,1005 2265,1005 2300,1005 2335,1005 2370,1005 2405,1005 2845,1005 2880,1005 2915,1005 2950,1005 2985,1005 3020,1005 3055,1005 3120,1005 3155,1005 3190,1005 3225,1005 3260,1005 3295,1005 3330,1005 3770,1005 3805,1005 3840,1005 3875,1005 3910,1005 3945,1005 3980,1005 4045,1005 4080,1005 4115,1005 4150,1005 4185,1005 4220,1005 4255,1005 4695,1005 4730,1005 4765,1005 4800,1005 4835,1005 4870,1005 4905,1005 4970,1005 5005,1005 5040,1005 5075,1005 5110,1005 5145,1005 5180,1005 5620,1005 5655,1005 5690,1005 5725,1005 5760,1005 5795,1005 5830,1005 1270,1040 1305,1040 1340,1040 1375,1040 1410,1040 1445,1040 1480,1040 1920,1040 1955,1040 1990,1040 2025,1040 2060,1040 2095,1040 2130,1040 2195,1040 2230,1040 2265,1040 2300,1040 2335,1040 2370,1040 2405,1040 2845,1040 2880,1040 2915,1040 2950,1040 2985,1040 3020,1040 3055,1040 3120,1040 3155,1040 3190,1040 3225,1040 3260,1040 3295,1040 3330,1040 3770,1040 3805,1040 3840,1040 3875,1040 3910,1040 3945,1040 3980,1040 4045,1040 4080,1040 4115,1040 4150,1040 4185,1040 4220,1040 4255,1040 4695,1040 4730,1040 4765,1040 4800,1040 4835,1040 4870,1040 4905,1040 4970,1040 5005,1040 5040,1040 5075,1040 5110,1040 5145,1040 5180,1040 5620,1040 5655,1040 5690,1040 5725,1040 5760,1040 5795,1040 5830,1040 1270,1075 1305,1075 1340,1075 1375,1075 1410,1075 1445,1075 1480,1075 1920,1075 1955,1075 1990,1075 2025,1075 2060,1075 2095,1075 2130,1075 2195,1075 2230,1075 2265,1075 2300,1075 2335,1075 2370,1075 2405,1075 2845,1075 2880,1075 2915,1075 2950,1075 2985,1075 3020,1075 3055,1075 3120,1075 3155,1075 3190,1075 3225,1075 3260,1075 3295,1075 3330,1075 3770,1075 3805,1075 3840,1075 3875,1075 3910,1075 3945,1075 3980,1075 4045,1075 4080,1075 4115,1075 4150,1075 4185,1075 4220,1075 4255,1075 4695,1075 4730,1075 4765,1075 4800,1075 4835,1075 4870,1075 4905,1075 4970,1075 5005,1075 5040,1075 5075,1075 5110,1075 5145,1075 5180,1075 5620,1075 5655,1075 5690,1075 5725,1075 5760,1075 5795,1075 5830,1075 5255,2925 2695,3045 4210,3460
  other v2: 5605,1890 5605,1920 5605,1950 5605,1980 5605,2010 5605,2040 5605,2070 5750,2080 5790,2080 5605,2100 5750,2120 5790,2120 5057.58,2195.31 5095.58,2195.31 5058.58,2232.31 5095.58,2233.31 4832.58,2289.31 4862.58,2289.31 4891.58,2289.31 4921.58,2289.31 4832.58,2324.31 4862.58,2324.31 4891.58,2324.31 4921.58,2324.31 4832.58,2359.31 4862.58,2359.31 4891.58,2359.31 4921.58,2359.31 5123.58,2384.31 5153.58,2384.31 5182.58,2385.31 5212.58,2385.31 4832.58,2394.31 4862.58,2394.31 4891.58,2394.31 4921.58,2394.31
  other v3: 1618.39,911.69 1661.69,911.69 1705,911.69 1748.31,911.69 1791.61,911.69 2543.39,911.69 2586.69,911.69 2630,911.69 2673.31,911.69 2716.61,911.69 3468.39,911.69 3511.69,911.69 3555,911.69 3598.31,911.69 3641.61,911.69 4393.39,911.69 4436.69,911.69 4480,911.69 4523.31,911.69 4566.61,911.69 5318.39,911.69 5361.69,911.69 5405,911.69 5448.31,911.69 5491.61,911.69 1618.39,955 1661.69,955 1705,955 1748.31,955 1791.61,955 2543.39,955 2586.69,955 2630,955 2673.31,955 2716.61,955 3468.39,955 3511.69,955 3555,955 3598.31,955 3641.61,955 4393.39,955 4436.69,955 4480,955 4523.31,955 4566.61,955 5318.39,955 5361.69,955 5405,955 5448.31,955 5491.61,955 1618.39,998.31 1661.69,998.31 1705,998.31 1748.31,998.31 1791.61,998.31 2543.39,998.31 2586.69,998.31 2630,998.31 2673.31,998.31 2716.61,998.31 3468.39,998.31 3511.69,998.31 3555,998.31 3598.31,998.31 3641.61,998.31 4393.39,998.31 4436.69,998.31 4480,998.31 4523.31,998.31 4566.61,998.31 5318.39,998.31 5361.69,998.31 5405,998.31 5448.31,998.31 5491.61,998.31 9951.02,3808.66 9994.33,3808.66 10037.64,3808.66 9951.02,3851.97 9994.33,3851.97 10037.64,3851.97 9951.02,3895.28 9994.33,3895.28 10037.64,3895.28 9951.02,3938.58 9994.33,3938.58 10037.64,3938.58 9951.02,3981.89 9994.33,3981.89 10037.64,3981.89
  other v4: 1445,325 2370,325 3295,325 4220,325 5145,325 10150,3310
GPIO0_EXP: EXP0.37 U5.7 | length 95.4
  Top Layer w8: v2(1845,2277.56) 1875,2277.56 1888.82,2291.38 U5.7@1934.65,2291.38
GPIO1_EXP: EXP0.38 U5.10
GPIO2_EXP: EXP0.39 U5.27
GPIO3_EXP: EXP0.40 U5.28
I2C_SCL: EXP0.13 U5.77 | length 3118.6
  Top Layer w8: EXP0.13@200,905 245,905 496,1156 496,1467.21 628.79,1600 1840,1600 1865,1625 1910.95,1625 1994.08,1708.12 1994.08,1709.08 2084.25,1799.25 U5.77@2765.35,1799.25
I2C_SDA: EXP0.14 U5.91 | length 3332.8
  Top Layer w8: EXP0.14@100,905 145,950 270.2,950 482,1161.8 482,1473.01 623.99,1615 1835.2,1615 1860.2,1640 1906.16,1640 1980.08,1713.92 1980.08,1714.88 2080.2,1815 2455,1815 2714.84,2074.84 U5.91@2765.35,2074.84
INPUT_GND: C58.1 C59.1 FB6.1 FB7.1 FB8.1 U6.2 U6.8 | length 625.4
  Top Layer w22: v4(170,2380) FB6.1@231.38,2380 ; v4(190,3005) FB8.1@251.38,3005 ; v4(680,2445) FB7.1@680,2501.38 ; v4@1025,2665 U6.2@1025,2509.88 1025,2411.85 C59.1@1026.85,2410 ; C58.1@1323.15,2410 1325,2411.85 U6.8@1325,2509.88 v4(1414.88,2509.88)
  other v4: 1025,2660
KRESET: "FET kRESET.1" EXP0.15 kRESET.1 | length 1931.5
  Top Layer w8: EXP0.15@200,1005 305.4,1005 468,1167.6 468,1478.8 619.2,1630 1615,1630 1640,1655 kRESET.1@1680,1655
MAX_ES: C2_EndstopChannel1.1 C2_EndstopChannel2.1 C2_EndstopChannel3.1 MAX1_EndstopChannel1.1 MAX1_EndstopChannel2.1 MAX1_EndstopChannel3.1 R3_EndstopChannel1.2 R3_EndstopChannel2.2 R3_EndstopChannel3.2 | length 698.7
  Top Layer w10: MAX1_EndstopChannel2.1@670,340 670,310 689.06,290.94 R3_EndstopChannel2.2@865,290.94 ; MAX1_EndstopChannel3.1@670,840 670,810 689.06,790.94 R3_EndstopChannel3.2@865,790.94 ; MAX1_EndstopChannel1.1@670,1340 670,1310 689.06,1290.95 R3_EndstopChannel1.2@865,1290.95
MAX_ES1: U5.24 | length 213.5
  Top Layer w8: U5.24@1934.65,1956.73 2033.27,1956.73 2065,1925 v2(2135,1925)
MAX_ES2: U5.22 | length 224.1
  Top Layer w8: U5.22@1934.65,1996.1 2078.9,1996.1 2100,1975 v2(2150,1975)
MAX_ES3: U5.4 | length 150.5
  Top Layer w8: U5.4@1934.65,2350.43 2050.43,2350.43 v2(2075,2375)
MIN_ES: C1_EndstopChannel1.1 C1_EndstopChannel2.1 C1_EndstopChannel3.1 MIN1_EndstopChannel1.1 MIN1_EndstopChannel2.1 MIN1_EndstopChannel3.1 R2_EndstopChannel1.2 R2_EndstopChannel2.2 R2_EndstopChannel3.2 | length 633
  Top Layer w10: C1_EndstopChannel2.1@815,133.03 998.03,133.03 MIN1_EndstopChannel2.1@1010,145 ; C1_EndstopChannel3.1@815,593.03 958.03,593.03 MIN1_EndstopChannel3.1@1010,645 ; C1_EndstopChannel1.1@815,1093.03 958.03,1093.03 MIN1_EndstopChannel1.1@1010,1145
MIN_ES1: U5.25 | length 99.5
  Top Layer w8: U5.25@1934.65,1937.05 2002.95,1937.05 v2(2025,1915)
MIN_ES2: U5.23 | length 159.2
  Top Layer w8: U5.23@1934.65,1976.42 2063.58,1976.42 v2(2085,1955)
MIN_ES3: U5.6 | length 148.2
  Top Layer w8: U5.6@1934.65,2311.06 1981.06,2311.06 2000,2330 v2(2075,2330)
MISO: EXP0.12 R50.1 U4_ThermocoupleChannel1.7 U4_ThermocoupleChannel2.7 U5.68 | length 4885.2
  Top Layer w8: EXP0.12@100,805 150,855 330.6,855 510,1034.4 510,1461.41 634.59,1586 1881,1586 v2(1895,1600) ; v2(1945,1520) 2043.06,1520 2098.12,1464.94 2098.45,1464.94 2118.39,1445 2490,1445 2615.75,1570.75 U5.68@2615.75,1649.65 ; v2(3200,2970) 3200,2955 U4_ThermocoupleChannel2.7@3210,2945 ; v2(3200,3545) 3225,3520 U4_ThermocoupleChannel1.7@3250.51,3520 ; U4_ThermocoupleChannel2.7@3250.51,2945 U4_ThermocoupleChannel2.7@3210,2945 ; 3964.63,2831 3252.17,2831 3190,2893.17 3190,2930 3205,2945 U4_ThermocoupleChannel2.7@3210,2945
  Bottom Layer w8: v2(1895,1600) 1945,1550 v2(1945,1520) ; v2(3200,2970) 3200,3495 3190,3505 3190,3535 v2(3200,3545)
MOD0E1: U5.117 | length 144
  Top Layer w8: U5.117@2537.01,2480.35 2537.01,2382.99 v2(2570,2350)
MOD0E2: U5.120 | length 121.6
  Top Layer w8: U5.120@2477.95,2480.35 2477.95,2397.05 v2(2505,2370)
MOD0E3: U5.122
MOD0E4: U5.124
MOD0E5: U5.127
MOD1E1: U5.40 | length 86.4
  Top Layer w8: v2(2050,1730) 2064.57,1715.43 U5.40@2064.57,1649.65
MOD1E2: U5.41 | length 126
  Top Layer w8: U5.41@2084.25,1649.65 2084.25,1704.25 2110,1730 v2(2110,1765)
MOD1E3: U5.48
  other v2: 2215,1880
MOD1E4: U5.54
MOD1E5: U5.58
MOD2E1: U5.67 | length 111.1
  Top Layer w8: v2(2570,1750) 2596.06,1723.94 U5.67@2596.06,1649.65
MOD2E2: U5.69 | length 135.9
  Top Layer w8: v2(2610,1775) 2610,1735 2635.43,1709.57 U5.69@2635.43,1649.65
MOD2E3: U5.74 | length 95.6
  Top Layer w8: v2(2680,1765) 2704.8,1740.2 U5.74@2765.35,1740.2
MOD2E4: U5.78 | length 99.6
  Top Layer w8: U5.78@2765.35,1818.94 2831.06,1818.94 v2(2855,1795)
MOD2E5: U5.84 | length 89.9
  Top Layer w8: v2(2685,1960) 2707.95,1937.05 U5.84@2765.35,1937.05
MODE0: U7_DriverChannelDRV88251.24 U7_DriverChannelDRV88252.24 U7_DriverChannelDRV88253.24 U7_DriverChannelDRV88254.24 U7_DriverChannelDRV88255.24 | length 1460.7
  Top Layer w8: 1575,1340 1575,1185 1641.02,1118.98 U7_DriverChannelDRV88251.24@1641.02,1067.2 ; 2500,1300 2500,1185 2566.02,1118.98 U7_DriverChannelDRV88252.24@2566.02,1067.2 ; 3425,1340 3425,1185 3491.02,1118.98 U7_DriverChannelDRV88253.24@3491.02,1067.2 ; 4350,1340 4350,1185 4416.02,1118.98 U7_DriverChannelDRV88254.24@4416.02,1067.2 ; 5275,1340 5275,1185 5341.02,1118.98 U7_DriverChannelDRV88255.24@5341.02,1067.2
MODE0_EXP1: EXP0.29 U5.62 | length 3274.5
  Top Layer w8: EXP0.29@200,1705 434.8,1705 549.8,1820 1233.78,1820 1263.28,1849.5 1263.49,1849.5 1303.99,1890 1380,1890 1420,1930 1420,1950 v2(1435,1965) ; v2(1450,1485) 1505,1485 1560,1430 1680.4,1430 1705.4,1455 1875,1455 1910,1420 2024.27,1420 2063.33,1380.94 2063.66,1380.94 2109.6,1335 2375.4,1335 2450.4,1410 v2(2485,1410) ; U5.62@2497.64,1649.65 2497.64,1587.36 v2(2510,1575)
  Bottom Layer w8: v2(1435,1965) 1486,1914 1486,1666 1450,1630 v2(1450,1485) ; v2(2485,1410) 2510,1435 v2(2510,1575)
MODE0_EXP2: EXP0.30 U5.31 | length 2049.6
  Top Layer w8: EXP0.30@100,1705 145,1750 460,1750 545,1835 1228.98,1835 1257.48,1863.5 1257.7,1863.5 1307.2,1913 1358,1913 v2(1360,1915) ; v2(1400,1780) 1439.28,1819.28 1934.31,1819.28 U5.31@1934.65,1818.94
  Bottom Layer w8: v2(1360,1915) 1387.5,1887.5 1387.5,1792.5 v2(1400,1780)
MODE1: U7_DriverChannelDRV88251.25 U7_DriverChannelDRV88252.25 U7_DriverChannelDRV88253.25 U7_DriverChannelDRV88254.25 U7_DriverChannelDRV88255.25 | length 1438.8
  Top Layer w8: 1560,1340 1560,1180 1615.43,1124.57 U7_DriverChannelDRV88251.25@1615.43,1067.2 ; 2485,1300 2485,1180 2540.43,1124.57 U7_DriverChannelDRV88252.25@2540.43,1067.2 ; 3410,1340 3410,1180 3465.43,1124.57 U7_DriverChannelDRV88253.25@3465.43,1067.2 ; 4335,1340 4335,1180 4390.43,1124.57 U7_DriverChannelDRV88254.25@4390.43,1067.2 ; 5260,1340 5260,1180 5315.43,1124.57 U7_DriverChannelDRV88255.25@5315.43,1067.2
MODE1_EXP1: EXP0.31 U5.70 | length 3361.9
  Top Layer w8: EXP0.31@200,1805 490,1805 535,1850 1224.19,1850 1251.69,1877.5 1251.9,1877.5 1301.4,1927 1337,1927 1355,1945 1375,1945 1420,1990 1455,1990 v2(1465,1980) ; v2(1475,1455) 1510,1455 1550,1415 1685.2,1415 1710.2,1440 1870,1440 1905,1405 2019.47,1405 2057.53,1366.94 2057.86,1366.94 2104.8,1320 2380.2,1320 2445.2,1385 2515,1385 2655,1525 2655,1649.53 U5.70@2655.12,1649.65
  Bottom Layer w8: v2(1465,1980) 1500,1945 1500,1480 v2(1475,1455)
MODE1_EXP2: EXP0.32 U5.35 | length 2375.9
  Top Layer w8: EXP0.32@100,1805 145,1850 515,1850 530,1865 1219.39,1865 1245.89,1891.5 1246.1,1891.5 1295.6,1941 1321,1941 1340,1960 1370,1960 1415,2005 1495,2005 1555,2065 1650,2065 1670,2085 1820,2085 v2(1840,2105) ; v2(1850,1705) 1860,1705 1895.2,1740.2 U5.35@1934.65,1740.2
  Bottom Layer w8: v2(1840,2105) 1840,1890 1860,1870 1860,1765 1850,1755 v2(1850,1705)
MODE2: U7_DriverChannelDRV88251.26 U7_DriverChannelDRV88252.26 U7_DriverChannelDRV88253.26 U7_DriverChannelDRV88254.26 U7_DriverChannelDRV88255.26 | length 1593.6
  Top Layer w8: 1475,1340 1475,1200 1515,1160 1560,1160 1589.84,1130.16 U7_DriverChannelDRV88251.26@1589.84,1067.2 ; 2400,1200 2440,1160 2485,1160 2514.84,1130.16 U7_DriverChannelDRV88252.26@2514.84,1067.2 ; 3325,1340 3325,1200 3365,1160 3410,1160 3439.84,1130.16 U7_DriverChannelDRV88253.26@3439.84,1067.2 ; 4250,1340 4250,1200 4290,1160 4335,1160 4364.84,1130.16 U7_DriverChannelDRV88254.26@4364.84,1067.2 ; 5175,1340 5175,1200 5215,1160 5260,1160 5289.84,1130.16 U7_DriverChannelDRV88255.26@5289.84,1067.2
MODE2_EXP1: EXP0.33 U5.73 | length 3583.8
  Top Layer w8: EXP0.33@200,1905 460,1905 485,1880 1214.59,1880 1240.09,1905.5 1240.3,1905.5 1289.8,1955 1315,1955 v2(1355,1995) ; v2(1410,1490) 1410,1470 1480,1400 1690,1400 1715,1425 1865,1425 1900,1390 2014.67,1390 2051.73,1352.94 2052.06,1352.94 2100,1305 2385,1305 2450,1370 2520,1370 2650,1500 2765,1500 2795,1530 2795,1690.87 U5.73@2765.35,1720.51
  Bottom Layer w8: v2(1355,1995) 1384.5,1965.5 1384.5,1944.08 1444,1884.58 1444,1735.82 1380,1671.82 1380,1560 1410,1530 v2(1410,1490)
MODE2_EXP2: EXP0.34 U5.34 | length 2184.1
  Top Layer w8: EXP0.34@100,1905 150,1955 440,1955 500,1895 1209.79,1895 1234.29,1919.5 1234.5,1919.5 1285,1970 1305,1970 1332.5,1997.5 1332.5,2004.32 1348.18,2020 1470,2020 v2(1485,2035) ; v2(1675,1740) 1700,1715 1828.18,1715 1873.06,1759.88 U5.34@1934.65,1759.88
  Bottom Layer w8: v2(1485,2035) 1515,2005 1515,1885 1585,1815 1635,1815 1675,1775 v2(1675,1740)
MOSI: EXP0.10 R53.1 U3.7 U5.42 | length 2686.8
  Top Layer w8: EXP0.10@100,705 145,750 265.2,750 538,1022.8 538,1449.81 646.19,1558 2083,1558 2103.94,1578.94 U5.42@2103.94,1649.65
NetC13_2: C13.2 U3.6
NetC17_1: C17.1 C20.2 FB1.1 U10.14
NetC21_2: C21.2 FB1.2 U10.15 | length 83.9
  Top Layer w15: U10.15@10132.91,3733.5 10134.41,3735 10216.22,3735
NetC22_1: C22.1 F4.1 U2.10 U2.11 U2.12 U2.13
NetC24_2: C24.2 U2.9
NetC43_2: C43.2 U5.141 X2.1 | length 330.2
  Top Layer w8: C43.2@1927.44,2745 1927.44,2647.56 X2.1@1940,2635 1955,2635 2064.57,2525.43 U5.141@2064.57,2480.35
NetC44_2: C44.2 U5.142 X2.2 | length 487.5
  Top Layer w8: X2.2@1790,2635 1790,2585 1815,2560 2010.2,2560 2044.88,2525.32 U5.142@2044.88,2480.35 ; X2.2@1790.39,2635 1790.39,2645.39 1797.56,2652.56 C44.2@1797.56,2745
NetC56_2: "Logic Source1.1" C56.2 U6.14 | length 206
  Top Layer w22: U6.14@1075,2870.12 1075,2940 1138.15,3003.15 C56.2@1138.15,3050
NetC57_2: C57.2 R16.2 U6.16 | length 178.9
  Top Layer w22: R16.2@865,2969.53 921.38,2969.53 C57.2@921.85,2970 975,2916.85 U6.16@975,2870.12
NetC58_2: C58.2 C59.2 U6.1 U6.3 U6.4 U6.5 USB.1 | length 1110.4
  Top Layer w22: U6.3@1075,2509.88 U6.4@1125,2509.88 U6.5@1175,2509.88 1175,2410 ; C59.2@1133.15,2410 1175,2410 ; C58.2@1216.85,2410 1175,2410
  Top Layer w25: USB.1@596,2635 785,2635 895.12,2524.88 U6.1@975,2524.88 ; U6.1@975,2509.88 975,2365 990,2350 1060,2350 1075,2365 U6.3@1075,2509.88
NetC66_DriverChannelDRV88251_2: C66_DriverChannelDRV88251.2 R30_DriverChannelDRV88251.2 U7_DriverChannelDRV88251.3 | length 266.8
  Top Layer w8: R30_DriverChannelDRV88251.2@1375,752.56 1452.56,752.56 1499,799 1570.92,799 1589.84,817.93 U7_DriverChannelDRV88251.3@1589.84,842.8
NetC66_DriverChannelDRV88252_2: C66_DriverChannelDRV88252.2 R30_DriverChannelDRV88252.2 U7_DriverChannelDRV88252.3 | length 266.8
  Top Layer w8: R30_DriverChannelDRV88252.2@2300,752.56 2377.56,752.56 2424,799 2495.92,799 2514.84,817.93 U7_DriverChannelDRV88252.3@2514.84,842.8
NetC66_DriverChannelDRV88253_2: C66_DriverChannelDRV88253.2 R30_DriverChannelDRV88253.2 U7_DriverChannelDRV88253.3 | length 266.8
  Top Layer w8: R30_DriverChannelDRV88253.2@3225,752.56 3302.56,752.56 3349,799 3420.92,799 3439.84,817.93 U7_DriverChannelDRV88253.3@3439.84,842.8
NetC66_DriverChannelDRV88254_2: C66_DriverChannelDRV88254.2 R30_DriverChannelDRV88254.2 U7_DriverChannelDRV88254.3 | length 266.8
  Top Layer w8: R30_DriverChannelDRV88254.2@4150,752.56 4227.56,752.56 4274,799 4345.92,799 4364.84,817.93 U7_DriverChannelDRV88254.3@4364.84,842.8
NetC66_DriverChannelDRV88255_2: C66_DriverChannelDRV88255.2 R30_DriverChannelDRV88255.2 U7_DriverChannelDRV88255.3 | length 266.8
  Top Layer w8: R30_DriverChannelDRV88255.2@5075,752.56 5152.56,752.56 5199,799 5270.92,799 5289.84,817.93 U7_DriverChannelDRV88255.3@5289.84,842.8
NetC68_DriverChannelDRV88251_1: C68_DriverChannelDRV88251.1 U7_DriverChannelDRV88251.1 | length 128.8
  Top Layer w8: C68_DriverChannelDRV88251.1@1427.56,800 1470.35,842.8 U7_DriverChannelDRV88251.1@1538.66,842.8
NetC68_DriverChannelDRV88251_2: C68_DriverChannelDRV88251.2 U7_DriverChannelDRV88251.2 | length 280.9
  Top Layer w8: C68_DriverChannelDRV88251.2@1372.44,800 1372.44,827.44 1385,840 1447.76,840 1464.56,856.8 1501.8,856.8 1531.26,886.26 1553.74,886.26 1564.25,875.75 U7_DriverChannelDRV88251.2@1564.25,842.8
NetC68_DriverChannelDRV88252_1: C68_DriverChannelDRV88252.1 U7_DriverChannelDRV88252.1 | length 128.8
  Top Layer w8: C68_DriverChannelDRV88252.1@2352.56,800 2395.35,842.8 U7_DriverChannelDRV88252.1@2463.66,842.8
NetC68_DriverChannelDRV88252_2: C68_DriverChannelDRV88252.2 U7_DriverChannelDRV88252.2 | length 280.9
  Top Layer w8: C68_DriverChannelDRV88252.2@2297.44,800 2297.44,827.44 2310,840 2372.76,840 2389.56,856.8 2426.8,856.8 2456.26,886.26 2478.74,886.26 2489.25,875.75 U7_DriverChannelDRV88252.2@2489.25,842.8
NetC68_DriverChannelDRV88253_1: C68_DriverChannelDRV88253.1 U7_DriverChannelDRV88253.1 | length 128.8
  Top Layer w8: C68_DriverChannelDRV88253.1@3277.56,800 3320.35,842.8 U7_DriverChannelDRV88253.1@3388.66,842.8
NetC68_DriverChannelDRV88253_2: C68_DriverChannelDRV88253.2 U7_DriverChannelDRV88253.2 | length 280.9
  Top Layer w8: C68_DriverChannelDRV88253.2@3222.44,800 3222.44,827.44 3235,840 3297.76,840 3314.56,856.8 3351.8,856.8 3381.26,886.26 3403.74,886.26 3414.25,875.75 U7_DriverChannelDRV88253.2@3414.25,842.8
NetC68_DriverChannelDRV88254_1: C68_DriverChannelDRV88254.1 U7_DriverChannelDRV88254.1 | length 128.8
  Top Layer w8: C68_DriverChannelDRV88254.1@4202.56,800 4245.35,842.8 U7_DriverChannelDRV88254.1@4313.66,842.8